# EAGLE board orb (EAGLE 5.12)
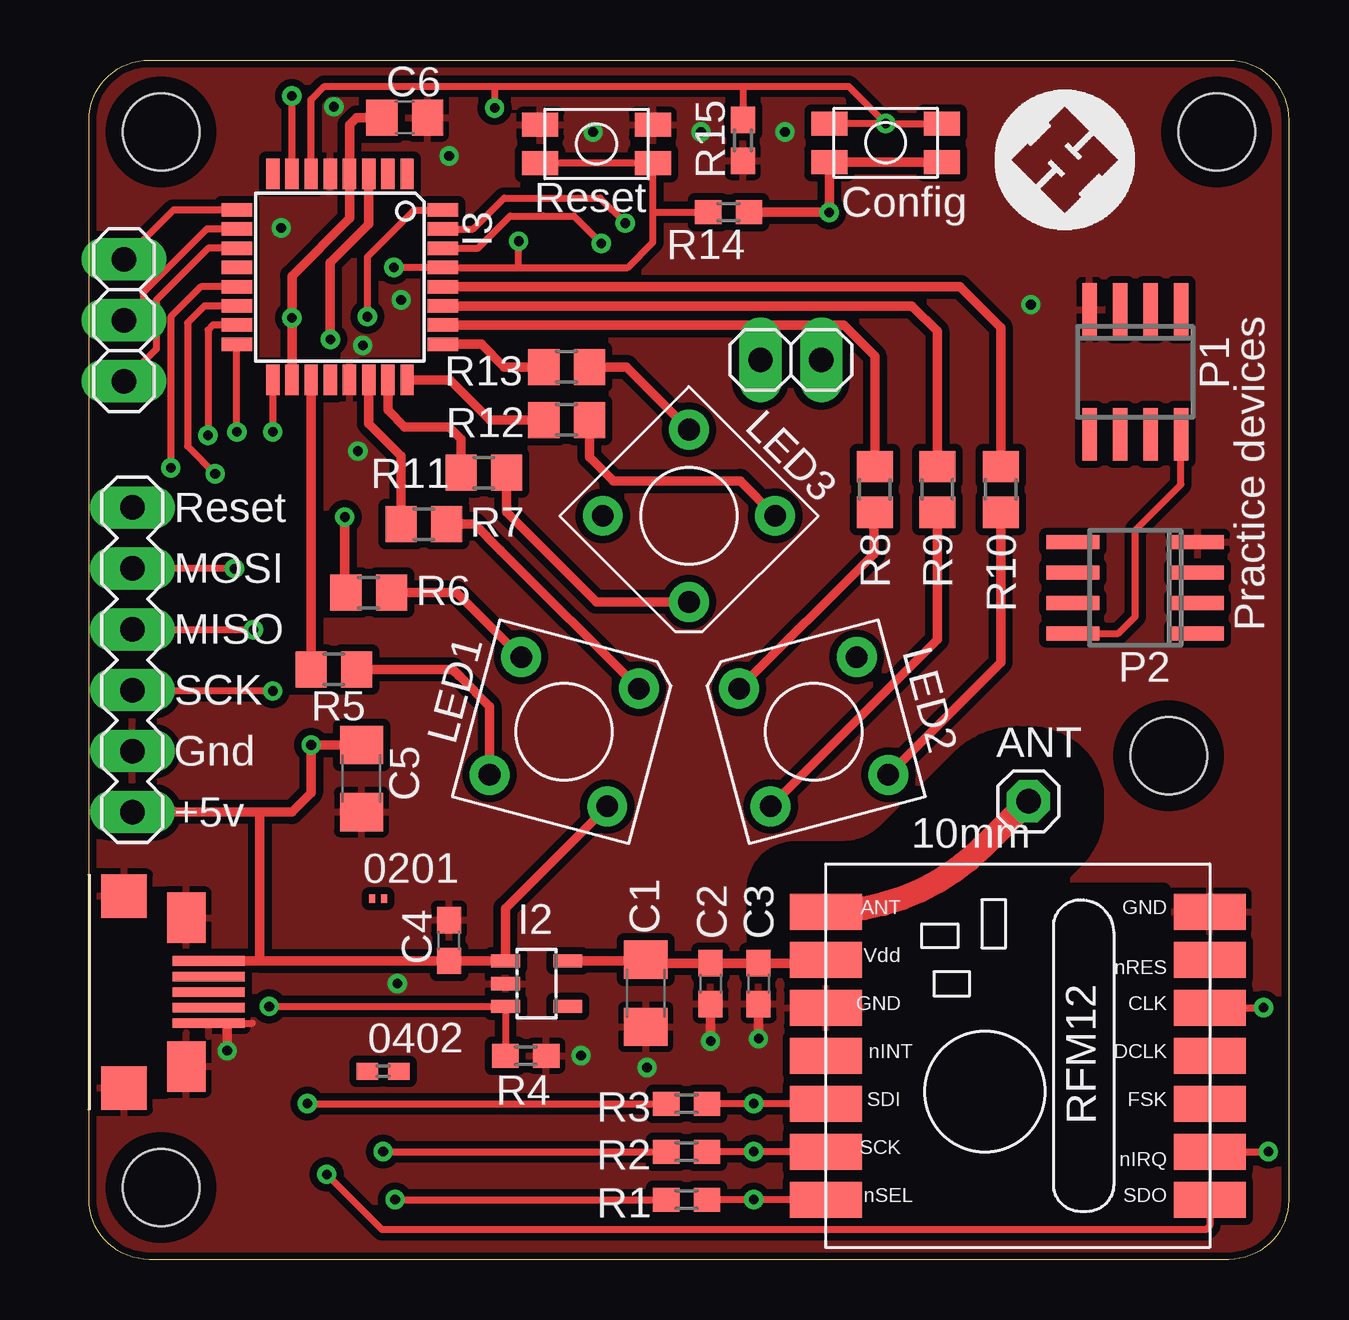
[diagram p0: board, top side]
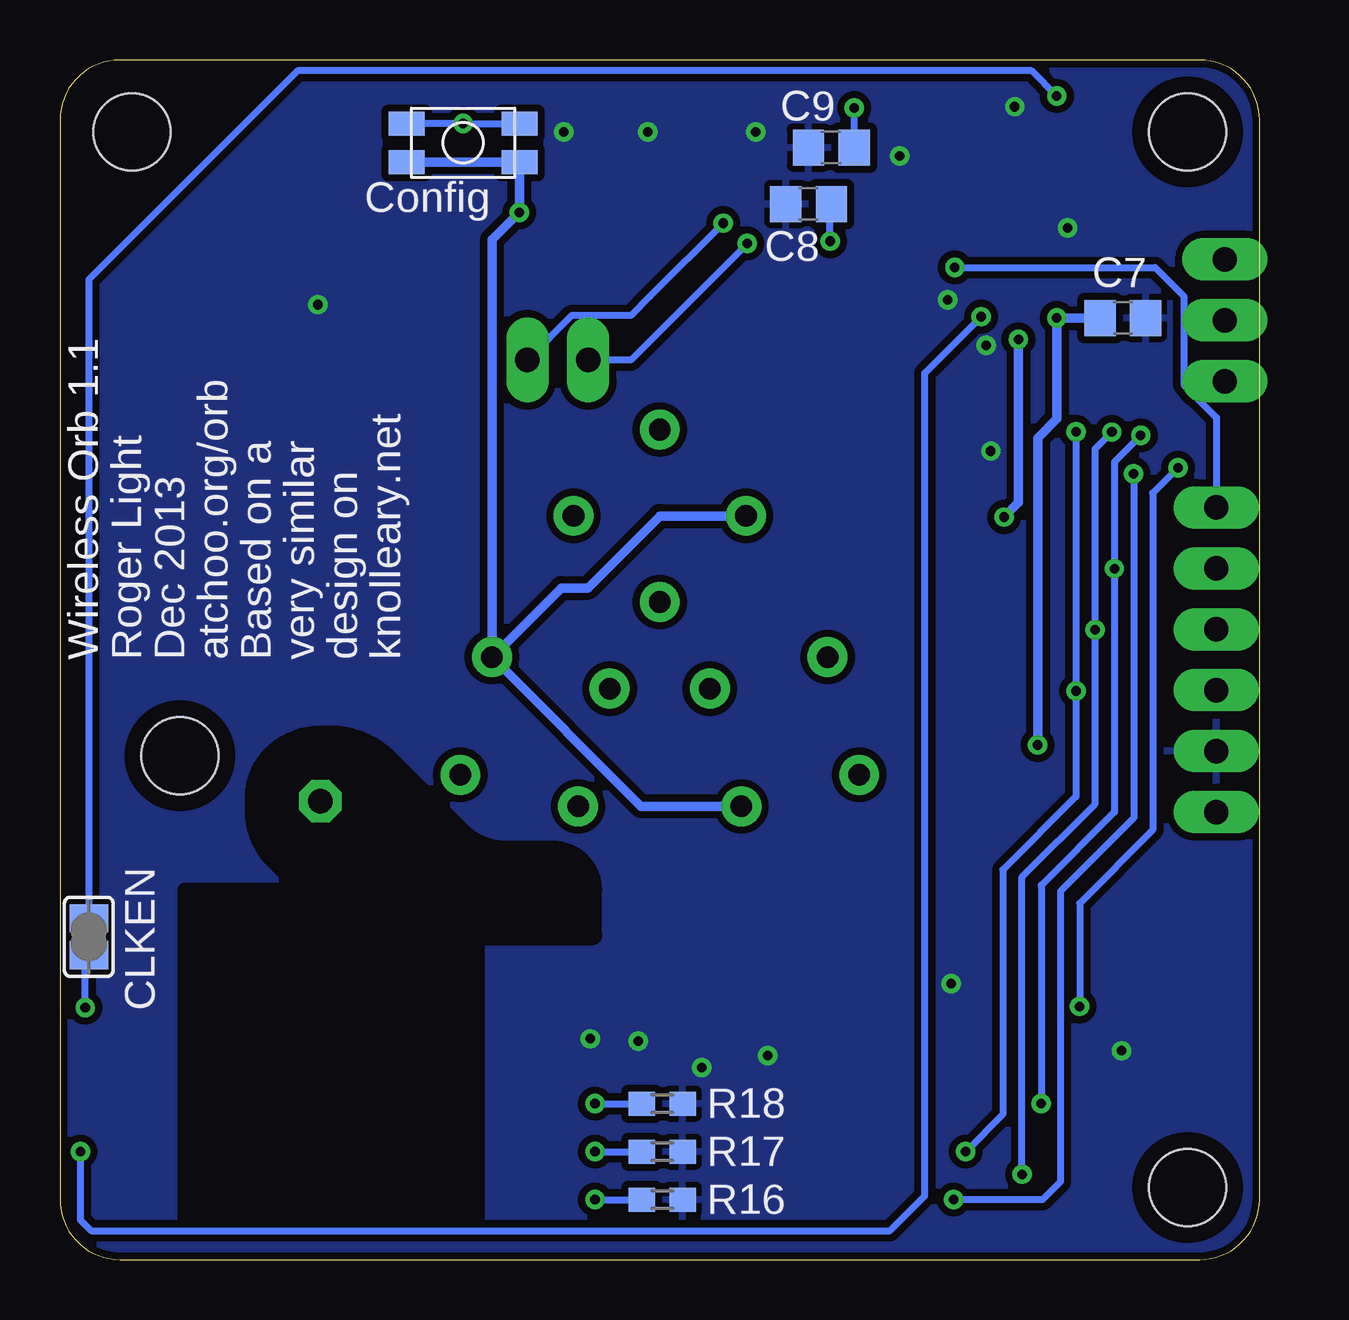
[diagram p1: board, bottom side, seen from below]

Size 50 x 50 mm. Coordinates in mm from the lower left corner, seen from the top.
Outline: 50,2.5 arc-90 47.5,0 2.5,0 arc-90 0,2.5 0,47.5 arc-90 2.5,50 47.5,50 arc-90 50,47.5 50,2.5
Copper layers (1+16): Top 0.0356mm / dielectric 1.5011mm / Bottom 0.0356mm
Design rules "ITEADstudio_DRC": minimum track width 6mil, minimum drill 12mil, track to track 6mil, track to pad 6mil, pad to pad 6mil, via to via 6mil, smd to smd 0mil, copper to edge 10mil, drill to drill 10mil, minimum pad ring 15mil, minimum via ring 8mil, stop-mask expansion 2mil, vias tented up to drill 0.701mm, thermal gap 10mil
Holes 3.2 mm at 3,3 3,47 47,47 45,21
tRestrict: area 32.6,1.8 to 44.8,15.4; area 1.2,45.2 to 4.8,48.8; area 45.2,45.2 to 48.8,48.8; area 1.2,1.2 to 4.8,4.8; area 43.2,19.2 to 46.8,22.8; 12 lines
bRestrict: area 32.6,1.8 to 44.8,15.4; area 45.2,45.2 to 48.8,48.8; area 1.2,45.2 to 4.8,48.8; area 1.2,1.2 to 4.8,4.8; area 43.2,19.2 to 46.8,22.8; 13 lines
vRestrict: area 32.6,1.8 to 44.8,15.4

## Footprints (pad centres in the part's own frame; a part is rotated, then mirrored left to right if it is on the bottom)
C0201 = smd 0.25 x 0.35: 1 -0.25,0; 2 0.25,0
C0402 = smd 0.9 x 0.7: 1 -0.65,0; 2 0.65,0
1X01 = drill 1.016 octagon: 1 0,0
C1206 = smd 1.6 x 1.8: 1 -1.4,0; 2 1.4,0
C0603 = smd 1.1 x 1: 1 -0.85,0; 2 0.85,0
C0805 = smd 1.3 x 1.5: 1 -0.95,0; 2 0.95,0
SJ = smd 1.168 x 1.6: 1 -0.762,0; 2 0.762,0
RFM12 = smd 1.5 x 3: 1 -5,-10; 2 -3,-10; 3 -1,-10; 4 1,-10; 5 3,-10; 6 5,-10; 7 7,-10; 8 7,6; 9 5,6; 10 3,6; 11 1,6; 12 -1,6; 13 -3,6; 14 -5,6
SOT23-5L = smd 0.55 x 1.2: 1 -0.95,-1.3; 2 0,-1.3; 3 0.95,-1.3; 4 0.95,1.3; 5 -0.95,1.3
TQFP32-08 = smd 1.27 x 0.559: 1 -4.293,2.8; 2 -4.293,2; 3 -4.293,1.2; 4 -4.293,0.4; 5 -4.293,-0.4; 6 -4.293,-1.2; 7 -4.293,-2; 8 -4.293,-2.8; 17 4.293,-2.8; 18 4.293,-2; 19 4.293,-1.2; 20 4.293,-0.4; 21 4.293,0.4; 22 4.293,1.2; 23 4.293,2; 24 4.293,2.8 | smd 0.559 x 1.27: 9 -2.8,-4.293; 10 -2,-4.293; 11 -1.2,-4.293; 12 -0.4,-4.293; 13 0.4,-4.293; 14 1.2,-4.293; 15 2,-4.293; 16 2.8,-4.293; 25 2.8,4.293; 26 2,4.293; 27 1.2,4.293; 28 0.4,4.293; 29 -0.4,4.293; 30 -1.2,4.293; 31 -2,4.293; 32 -2.8,4.293
1X02 = drill 1.016 long: 1 -1.27,0; 2 1.27,0
1X03 = drill 1.016 long: 1 -2.54,0; 2 0,0; 3 2.54,0
5MM-SUPERFLUX = drill 0.9 round: A 2.54,-2.54; B -2.54,-2.54; G -2.54,2.54; R 2.54,2.54
SO08 = smd 0.6 x 2.2: 1 -1.905,-2.6; 2 -0.635,-2.6; 3 0.635,-2.6; 4 1.905,-2.6; 5 1.905,2.6; 6 0.635,2.6; 7 -0.635,2.6; 8 -1.905,2.6
MA06-1 = drill 1.016 long: 1 -6.35,0; 2 -3.81,0; 3 -1.27,0; 4 1.27,0; 5 3.81,0; 6 6.35,0
R0603 = smd 1.1 x 1: 1 -0.85,0; 2 0.85,0
R0805 = smd 1.3 x 1.5: 1 -0.95,0; 2 0.95,0
ZX62-B-5PA = smd 2.1 x 1.6: CASE@1 -3.1,2.6; CASE@2 3.1,2.6 | smd 1.8 x 1.9: CASE@3 -4,0; CASE@4 4,0 | smd 0.4 x 3: D+ 0,3.525; D- -0.65,3.525; GND 1.3,3.525; ID 0.65,3.525; VCC -1.3,3.525
KMR4 = smd 1.5 x 1: 1 2.35,0.8; 2 2.35,-0.8; 3 -2.35,-0.8; 4 -2.35,0.8

## Placement (x,y rotation side)
0201  [C0201]  12.05,15.05 0 top
0402  [C0402]  12.25,7.85 0 top
ANT  [1X01]  39.15,19.1 0 top
C1  2.2u  [C1206]  23.2,11.1 270 top
C2  10n  [C0603]  25.9,11.5 270 top
C3  47p  [C0603]  27.9,11.5 270 top
C4  1u  [C0603]  15,13.3 90 top
C5  2.2u  [C1206]  11.35,20.05 270 top
C6  100n  [C0805]  13.15,47.6 0 top
C7  100n  [C0805]  5.7,39.25 0 bottom
C8  100n  [C0805]  18.8,44 180 bottom
C9  100n  [C0805]  17.85,46.35 180 bottom
CLKEN  [SJ]  48.8,13.45 270 bottom
I1  RFM12_SMDSMD  [RFM12]  36.7,7.5 90 top
I2  ZXCL330E5TA  [SOT23-5L]  18.65,11.5 270 top
I3  TINY48VA  [TQFP32-08]  10.45,40.95 270 top
JP1  [1X02]  29.25,37.5 0 top
JP3  [1X03]  1.45,39.15 270 top
LED1  PIRANHA-RGB  [5MM-SUPERFLUX]  19.8,22 345 top
LED2  PIRANHA-RGB  [5MM-SUPERFLUX]  30.2,22 105 top
LED3  PIRANHA-RGB  [5MM-SUPERFLUX]  25,31 225 top
P1  [SO08]  43.6,37 180 top
P2  [SO08]  43.6,28 90 top
PROG  [MA06-1]  1.8,25 90 top
R1  5k1  [R0603]  24.9,2.5 180 top
R2  5k1  [R0603]  24.9,4.5 180 top
R3  5k1  [R0603]  24.9,6.5 180 top
R4  10k  [R0603]  18.2,8.5 180 top
R5  75  [R0805]  10.2,24.6 0 top
R6  75  [R0805]  11.65,27.8 0 top
R7  150  [R0805]  13.95,30.65 0 top
R8  150  [R0805]  32.75,32.1 270 top
R9  75  [R0805]  35.35,32.1 270 top
R10  75  [R0805]  38,32.1 270 top
R11  150  [R0805]  16.45,32.8 0 top
R12  75  [R0805]  19.9,35 0 top
R13  75  [R0805]  19.9,37.2 0 top
R14  10k  [R0603]  26.65,43.65 0 top
R15  10k  [R0603]  27.25,46.65 90 top
R16  10k  [R0603]  24.9,2.5 180 bottom
R17  10k  [R0603]  24.9,4.5 180 bottom
R18  10k  [R0603]  24.9,6.5 180 bottom
U$1  USB-MICROB  [ZX62-B-5PA]  1.45,11.15 270 top
U$2  SWITCH2-4  [KMR4]  21.15,46.5 0 top
U$3  SWITCH2-4  [KMR4]  33.2,46.55 0 top
U$4  SWITCH2-4  [KMR4]  33.2,46.55 0 bottom

## Library data of the parts
0201 0402 C1-C9 R1-R18 = rcl
ANT JP1 JP3 = pinhead
CLKEN = jumper
I1-I3 LED1-LED3 PROG U$1-U$4 = orb
P1 P2 = linear

## Nets
3V3_EN: I2.3 I3.13 R4.2
+3V3: C1.1 C2.1 C3.1 I1.9 I2.5
+5V: C4.1 C5.1 C6.1 C7.1 I2.1 I3.4 I3.18 LED1.A LED2.A LED3.A PROG.1 R14.2 U$1.VCC U$3.2 U$3.3 U$4.2 U$4.3
\!IRQ: I1.2 I3.32
\!RESET: C8.1 I3.29 PROG.6 R14.1 U$2.2 U$2.3
\!SEL: I3.14 R1.2
CLK: CLKEN.1 I3.7
GND: C1.2 C2.2 C3.2 C4.2 C5.2 C6.2 C7.2 C8.2 C9.2 I1.7 I1.10 I2.2 I3.5 I3.21 P1.4 P2.4 PROG.2 R4.1 R15.1 R16.1 R17.1 R18.1 U$1.CASE@1 U$1.CASE@2 U$1.CASE@3 U$1.CASE@4 U$1.GND U$2.1 U$2.4
LED1B: I3.25 R13.1
LED1G: I3.24 R12.1
LED1R: I3.23 R11.1
LED2B: I3.19 R5.1
LED2G: I3.3 R6.1
LED2R: I3.22 R7.1
LED3B: I3.28 R10.1
LED3G: I3.27 R9.1
LED3R: I3.26 R8.1
MISO: I1.1 I3.16 PROG.4
MOSI: I3.15 PROG.5 R3.2
N$1: LED3.R R11.2
N$2: LED3.B R13.2
N$3: LED3.G R12.2
N$4: LED1.R R7.2
N$5: LED1.B R5.2
N$6: LED1.G R6.2
N$7: LED2.R R8.2
N$8: LED2.B R10.2
N$9: LED2.G R9.2
N$10: CLKEN.2 I1.5
N$11: I3.31 JP1.2
N$12: I3.30 JP1.1
N$13: I3.9 JP3.1
N$14: I3.10 JP3.2
N$15: I3.11 JP3.3
N$19: ANT.1 I1.8
N$20: I1.14 R1.1 R16.2
N$21: I1.13 R2.1 R17.2
N$22: C9.1 I3.6 R15.2 U$3.1 U$3.4 U$4.1 U$4.4
N$23: I1.12 R3.1 R18.2
SCK: I3.17 PROG.3 R2.2
V+: P1.8 P2.8

## Tracks (layer width: path | path; a pad name or v marks a point on that pad's centre or on a via)
3V3_EN  (via drill 0.4)
  Top 0.3: R4.2 I2.3 v7.5,10.55 | I3.13 4.65,40.55 3.4,39.3 v3.4,33
  Bottom 0.3: v3.4,33 4.45,31.95 4.45,17.9 7.5,14.85 v7.5,10.55
+3V3
  Top 0.3: C1.1 23.15,12.45 23.35,12.45
  Top 0.4: I1.9 30.6,12.5 30.6,12.35 C3.1 C2.1 23.45,12.35 23.35,12.45 | C1.1 23.2,12.45 23.15,12.45 I2.5
+5V  (via drill 0.4)
  Top 0.4: LED1.A 17.35,14.64 I2.1 C4.1 7.1,12.45 | C6.1 11.15,47.6 10.85,47.3 I3.4 10.85,43.4 8.45,41 v8.45,39.25 I3.18 | 7.1,18.65 8.45,18.65 9.25,19.45 v9.25,21.45 C5.1 | 27.25,43.65 R14.2 v30.85,43.65 U$4.2 U$4.3 | 7.1,12.45 U$1.VCC | 7.1,18.65 PROG.1 | 7.1,18.65 7.1,12.45
  Bottom 0.4: C7.1 v8.45,39.25 8.45,35.05 9.25,34.25 v9.25,21.45 | LED2.A 29.1,28 28,28 25,31 LED3.A | U$4.3 U$4.2 v30.85,43.65 32,42.5 LED2.A 25.77,18.89 LED1.A
  Bottom 0.406: LED2.A | LED2.A | LED2.A 32,25.15
\!IRQ  (via drill 0.4)
  Top 0.3: I1.2 v49.15,4.5 | I3.32 13.55,43.75 11.6,41.8 v11.6,39.3
  Bottom 0.3: v49.15,4.5 49.15,1.65 48.7,1.2 15.4,1.2 13.95,2.65 13.95,36.95 v11.6,39.3
\!RESET  (via drill 0.4)
  Top 0.3: v12.7,41.35 I3.29 17.9,41.35 | 23.5,43.65 R14.1 | 17.9,41.35 v17.9,42.45 | 17.9,41.35 22.45,41.35 23.5,42.4 23.5,43.65 | 23.5,43.65 U$2.2 U$2.3
  Bottom 0.3: v12.7,41.35 4.35,41.35 3.15,40.15 3.15,36.45 1.8,35.1 PROG.6 | 17.9,42.4 v17.9,42.45 17.9,44 C8.1
\!SEL  (via drill 0.4)
  Top 0.3: v12.75,2.5 R1.2 | I3.14 4.8,39.75 4.1,39.05 4.1,33.9 v5.25,32.75
  Bottom 0.3: v5.25,32.75 5.25,18.4 8.3,15.35 8.3,3.25 9.05,2.5 v12.75,2.5
CLK  (via drill 0.4)
  Top 0.3: I3.7 v8.45,48.5
  Bottom 0.3: CLKEN.1 48.8,40.85 40.1,49.55 9.5,49.55 v8.45,48.5
GND  (via drill 0.4)
  Top 0.3: 6,9.85 6.8,9.85
  Top 0.4: 25.9,10.7 C2.2 v25.9,9.1 | 27.9,10.7 C3.2 v27.9,9.2 | U$1.GND 4.9,9.85 | U$1.GND 4.1,9.85 | U$1.GND 5.75,9.85 v5.75,8.7
  other vias: 23.25,8 10.2,48.05 11.2,33.7 12.85,11.5 20.5,8.5 39.25,39.8 11.4,38.1 8,43 13,40 15,46 21,47 25.5,47 29,47
  pour Top (isolate 0.3): 0,50 50,50 50,0 0,0
  pour Bottom (isolate 0.3): 50,50 50,0 0,0 0,50
LED1B
  Top 0.4: I3.25 16.35,38.15 17.3,37.2 R13.1
LED1G
  Top 0.4: I3.24 15.04,36.66 16.7,35 R12.1
LED1R
  Top 0.4: I3.23 12.45,35.4 13.15,34.7 15,34.7 15.5,34.2 R11.1
LED2B
  Top 0.4: I3.19 R5.1
LED2G  (via drill 0.4)
  Top 0.4: I3.3 11.65,43.15 10.05,41.55 v10.05,38.35 | 10.65,27.8 R6.1 | v10.65,30.95 10.65,27.8 | 10.65,27.8 10.6,27.75
  Bottom 0.4: v10.05,38.35 10.05,31.55 v10.65,30.95
LED2R
  Top 0.4: I3.22 11.65,34.85 13,33.5 R7.1
LED3B
  Top 0.4: I3.28 36.3,40.55 38,38.85 R10.1
LED3G
  Top 0.4: I3.27 34.3,39.75 35.35,38.7 R9.1
LED3R
  Top 0.4: I3.26 31.45,38.95 32.75,37.65 R8.1
MISO  (via drill 0.4)
  Top 0.3: I1.1 46.7,1.4 46.55,1.25 12.2,1.25 v9.9,3.55 | v6.16,34.49 I3.16 | PROG.4 1.8,26.25 v6.85,26.25
  Bottom 0.3: v6.16,34.49 6.85,33.8 v6.85,26.25 6.85,19 9.9,15.95 v9.9,3.55
MOSI  (via drill 0.4)
  Top 0.3: I3.15 5.15,38.95 4.95,38.75 v4.95,34.35 | PROG.5 v6.05,28.8 | v9.1,6.5 R3.2
  Bottom 0.3: v4.95,34.35 6.05,33.25 v6.05,28.8 6.05,18.65 9.1,15.6 v9.1,6.5
N$1
  Top 0.4: LED3.R 21.14,27.41 17.4,31.15 R11.2 17.5,32.8 17.49,32.81 17.35,32.81 17.35,32.8
  Bottom 0.4: LED3.R
N$2
  Top 0.4: LED3.B 22.39,37.2 | 22.39,37.2 22.4,37.2 | 22.39,37.2 R13.2
N$3
  Top 0.4: LED3.G 27.14,32.45 21.85,32.45 20.85,33.45 R12.2
N$4
  Top 0.4: LED1.R 17.15,29.56 | 17.15,29.56 17.15,29.55 | 17.15,29.56 16.06,30.65 R7.2
N$5
  Top 0.4: LED1.B 16.69,23.06 15.45,24.3 | 15.45,24.3 15.4,24.35 | R5.2 15.15,24.6 15.45,24.3
N$6
  Top 0.4: LED1.G 15.31,27.8 R6.2
N$7
  Top 0.4: 32.7,31.2 32.7,31.25 | 32.7,31.2 R8.2 | LED2.R 32.7,29.41 32.7,31.2
N$8
  Top 0.4: LED2.B 38,24.89 R10.2
N$9
  Top 0.4: 35.3,31.1 R9.2 35.35,25.84 LED2.G
N$10  (via drill 0.4)
  Top 0.3: I1.5 v48.95,10.5
  Bottom 0.3: CLKEN.2 48.95,12.55 v48.95,10.5
N$11  (via drill 0.4)
  Top 0.3: I3.31 16,42.95 17.3,44.25 21.3,44.25 v22.35,43.2
  Bottom 0.3: v22.35,43.2 25.4,40.15 26.2,39.35 28.67,39.35 JP1.2
N$12  (via drill 0.4)
  Top 0.3: I3.30 16.2,42.15 17.55,43.5 18.9,43.5 | 18.9,43.5 18.95,43.5 | v21.35,42.35 20.2,43.5 18.9,43.5
  Bottom 0.3: JP1.1 26.2,37.5 v21.35,42.35
N$13
  Top 0.3: JP3.1 3.51,43.75 I3.9
N$14
  Top 0.3: JP3.2 1.45,39.1 2.25,39.9 2.25,40.3 4.9,42.95 5.25,42.95 I3.10
N$15
  Top 0.3: I3.11 4.95,42.15 2.8,40 2.8,37.95 JP3.3
N$19
  Top 1: I1.8 arc45 37.27,17.22 ANT.1
N$20  (via drill 0.4)
  Top 0.3: R1.1 25.7,2.5 | I1.14 v27.7,2.5 | v27.7,2.5 R1.1 | v27.7,2.5 R1.1
  Bottom 0.3: 25.7,2.5 R1.1 v27.7,2.5
N$21  (via drill 0.4)
  Top 0.3: I1.13 v27.7,4.5 | v27.7,4.5 R17.2 v27.7,4.5
  Bottom 0.3: v27.7,4.5 R17.2
N$22  (via drill 0.4)
  Top 0.3: I3.6 9.25,48.35 9.8,48.9 16.9,48.9 | 16.9,48.9 27.25,48.9 | 27.25,48.9 R15.2 | 16.9,48.9 v16.9,48 | 30.8,47.35 U$4.1 v33.2,47.35 | v33.2,47.35 U$4.4 | v33.2,47.35 31.65,48.9 27.25,48.9
  Bottom 0.3: v16.9,48 C9.1 | U$4.1 v33.2,47.35 U$4.4
N$23  (via drill 0.4)
  Top 0.3: 25.7,6.5 R3.1 v27.7,6.5 I1.12
  Bottom 0.3: 25.6,6.5 R3.1 v27.7,6.5
SCK  (via drill 0.4)
  Top 0.3: I3.17 v7.65,34.5 | 24.1,4.5 R2.2 v12.25,4.5 | PROG.3 1.8,23.75 1.85,23.7 v7.65,23.7
  Bottom 0.3: v7.65,34.5 v7.65,23.7 7.65,19.3 10.7,16.25 10.7,6.05 v12.25,4.5
V+
  Top 0.3: P1.8 45.5,32.3 43.6,30.4 43.6,26.8 42.89,26.09 P2.8

## Text on the board
tPlace: Reset | MOSI | MISO | Practice devices | SCK | Gnd | +5v | 10mm
bPlace: knolleary.net | design on | very similar | Based on a | atchoo.org/orb | Dec 2013 | Roger Light | Wireless Orb 1.1
tNames: Reset | Config
bNames: Config
tValues: PD0 | PD1 | PD5-7